# Altium PCB Bluetooth_Module_Programmer.PcbDoc
Units mm, origin at the board's own origin, x right, y up, seen from the top; angles counter-clockwise.
Board outline 36.32 x 17.27 mm, 2 copper layers (Top Layer, Bottom Layer); 5 components, 5 nets, 23 pads, 3 vias.
Unrouted connection lines stored in the file: 1.
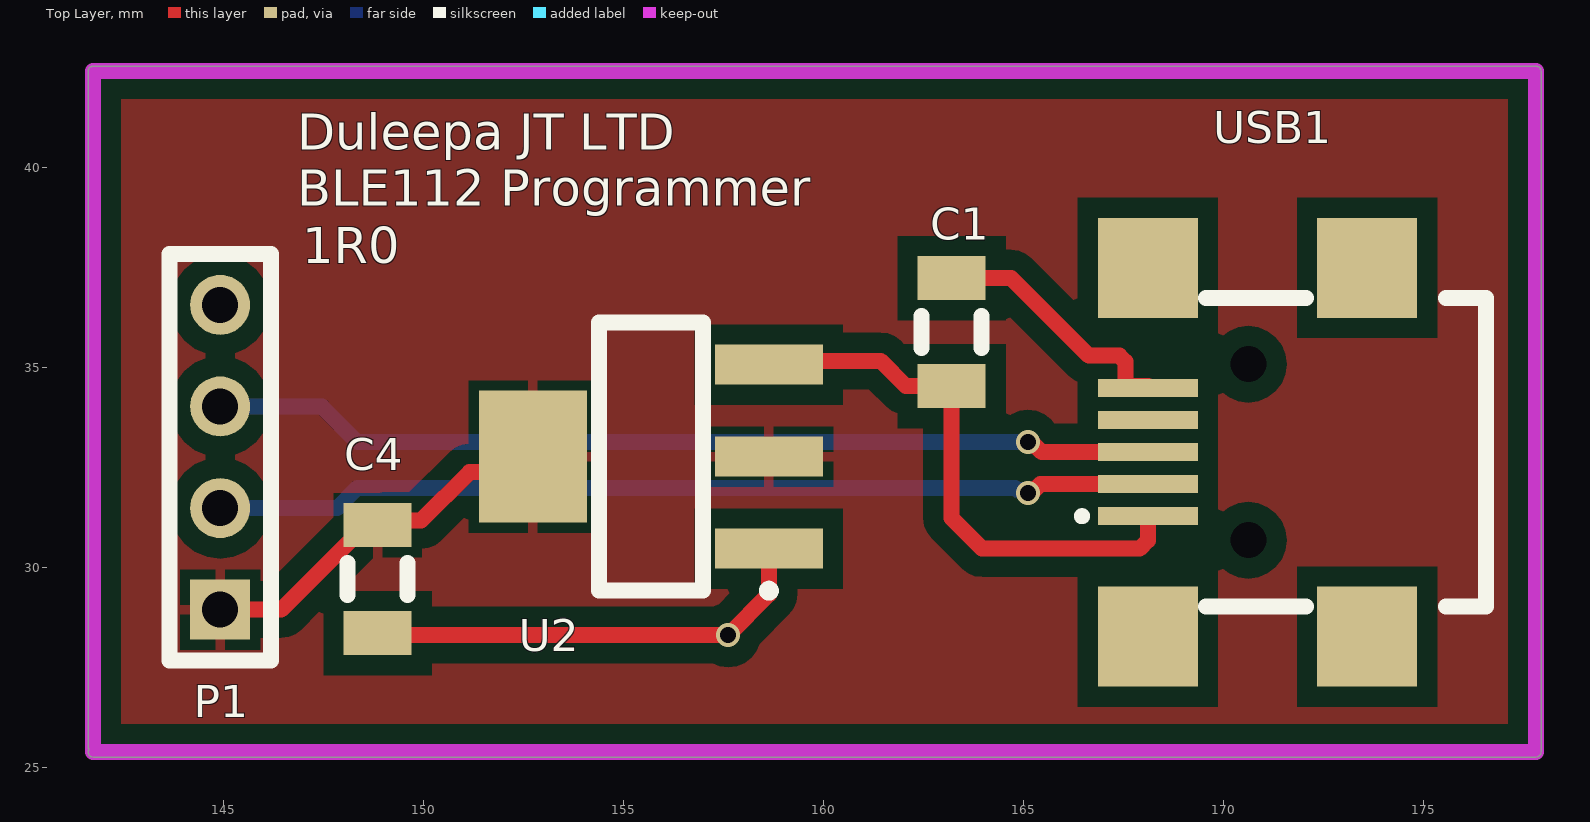
[diagram p0: Top Layer view]
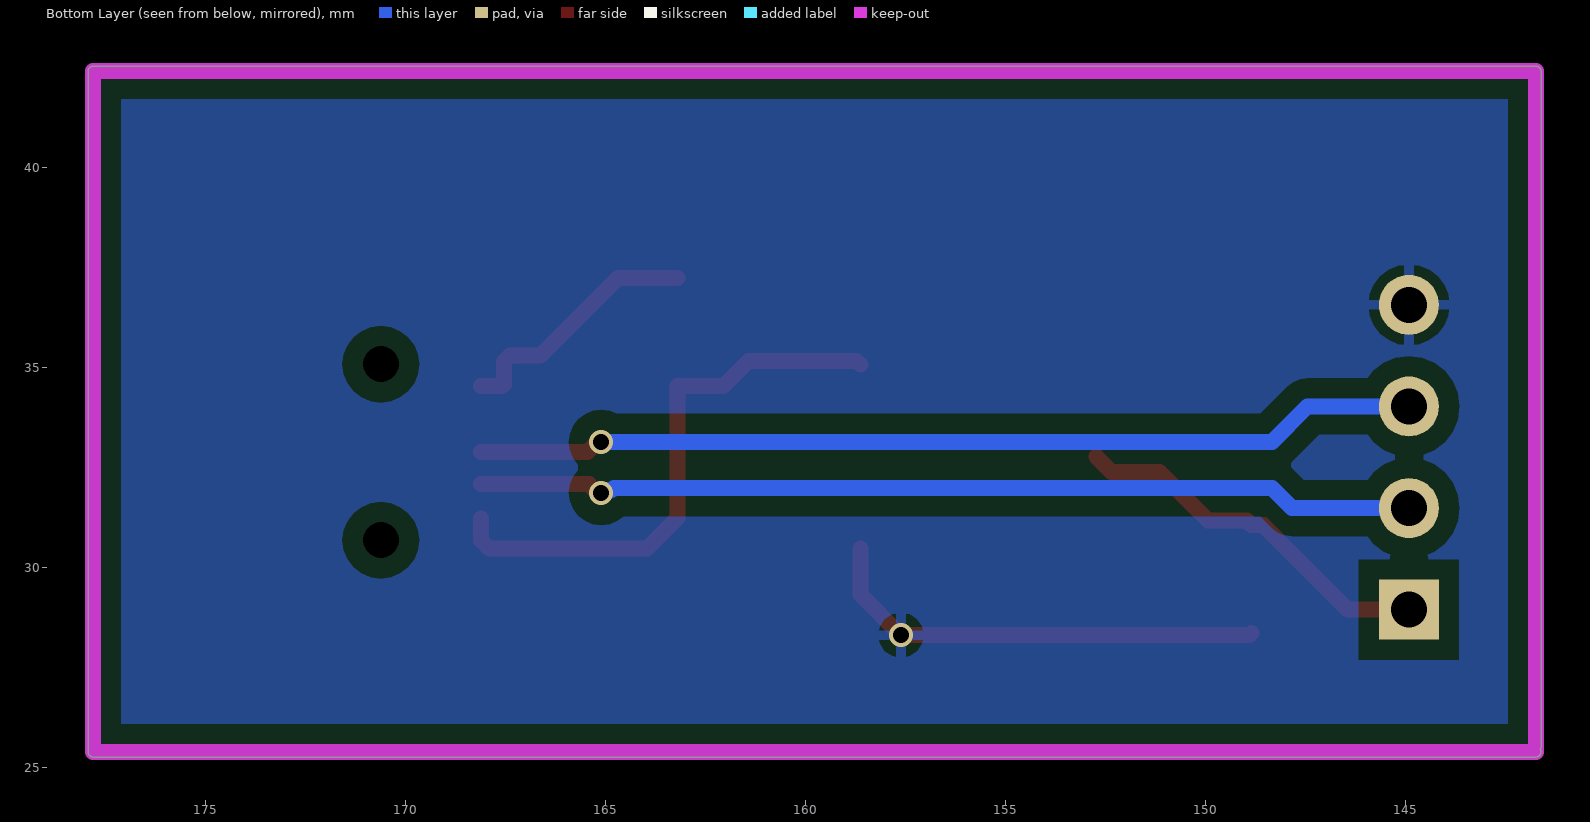
[diagram p1: Bottom Layer view, seen from below]
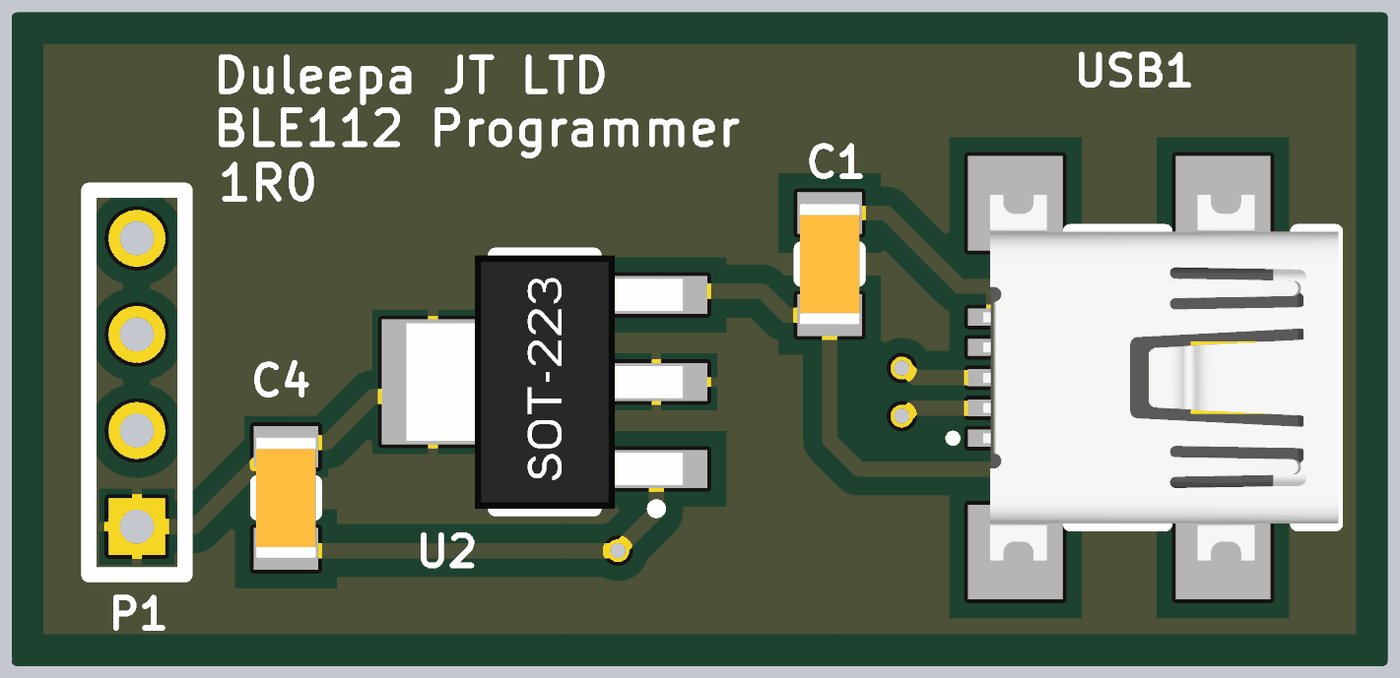
[diagram p2: 3D render of the assembled board from above, using the file's embedded part models]

## Layer stack, top to bottom
Top Solder: solder mask 0.0102, Solder Resist, Dk 3.5
Top Layer: signal copper 0.0356
Dielectric 1: dielectric 0.32, FR-4, Dk 4.8
Bottom Layer: signal copper 0.0356
Bottom Solder: solder mask 0.0102, Solder Resist, Dk 3.5

## Board outline
141.605,25.527 ccw(c141.732,25.527) 141.622,25.463 ccw(c141.732,25.4) 141.732,25.273 177.8,25.273 ccw(c177.8,25.4) 177.927,25.4 177.927,42.418 ccw(c177.8,42.418) 177.8,42.545 141.732,42.545 ccw(c141.732,42.418) 141.605,42.418

## Design rules (kind name [scope] priority, off if disabled: settings)
Clearance [All] p1: gap=0.5 ignorepadtopadclearanceinfootprint=TRUE
PolygonConnect [All] p1: connectstyle=Relief reliefconductorwidth=0.254 reliefentries=4 polygonreliefangle="90 Angle" airgapwidth=0.254
RoutingVias [All] p1: holewidth=0.711 width=1.27 viastyle="Through Hole" minholewidth=0.711 minwidth=1.27 maxholewidth=0.711 maxwidth=1.27
SolderMaskExpansion [All] p1: expansion=0.102 istentingtop=FALSE
Width [All] p1: maxlimit=0.6 minlimit=0.4 preferedwidth=0.4
30 further rules are at their usual default settings.

## Components (designator, comment, footprint, x,y, rotation, side; value= is the part's Value field where it differs from the comment)
C1 "1u" C1206 163.195,35.894 r270 top value=100nF/100V
C4 "4u7" C1206 148.844,29.718 r90 top value=100nF/100V
P1 "Header 4" HDR1X4 144.907,28.956 r90 top
U2 "LDL1117S33R" SOT223L 155.673,32.78 r180 top value=3.3V/1.2A
USB1 "USB Mini B Con" USB_UJ2MAB 171.45,32.893 r90 top

## Footprints (in the part's own frame and the unit in brackets; to place one, negate y for a bottom-side part, rotate by r counter-clockwise, add the part's x,y. Pads: shape width x height; smd on the part's side, far side on the other; paste and mask are expansions set on the pad)
C1206 [mm] "Chip Capacitor, Body 3.2x1.6mm, IPC High Density"
  rect 1.1x1.7 smd: 1(-1.35,0) 2(1.35,0)
  silkscreen extent -0.4,-0.75 0.4,0.75, body extent -1.6,-0.8 1.6,0.8, height 1.5
HDR1X4 [mm] "Connector; Header; 4 Position"
  rect 1.5x1.5 hole 0.9: 1(0,0)
  round 1.5 hole 0.9: 2(2.54,0) 3(5.08,0) 4(7.62,0)
  silkscreen extent -1.27,-1.27 8.89,1.27
SOT223L [mm] "SOT223/SC73, 4-Leads, Body 6.5x3.5mm, Pitch 2.3mm, Lead Span 7mm, IPC Low Density"
  rect 2.7x1 smd: 1(-2.95,2.3) 2(-2.95,0) 3(-2.95,-2.3)
  rect 2.7x3.3 smd: 2(2.95,0)
  silkscreen extent -3.08,-3.35 1.3,3.47, body extent -3.65,-3.35 3.65,3.35, height 1.83
USB_UJ2MAB [mm]
  rect 0.45x2.5 smd: 1(-1.6,3.35) 2(-0.8,3.35) 3(0,3.35) 4(0.8,3.35) 5(1.6,3.35)
  rect 2.5x2.5 smd: 6(-4.61,3.35) 7(4.61,3.35) 8(-4.61,-2.13) 9(4.61,-2.13)
  round 0.45 hole 0.9 unplated: 10(-2.2,0.84) 11(2.2,0.84)
  silkscreen extent -3.86,-5.1 3.86,5.1, body extent -4.83,-5.18 4.83,4.2, height 4.13

## Part data
C1 C4: library part "Cap CER Decoup C3216C0G2A104J160AC", "CAP CER 0.1UF 100V C0G 1206", Manufacturer="TDK Corporation", MPN=C3216C0G2A104J160AC, Supplier Part Number 1=1795799, Part Description="CAP CER 0.1UF 100V C0G 1206", Supplier 1=RSComponents, Supplier 2=Element14, Supplier 3=Digi-Key, Supplier 4=Mouser, Supplier Part Number 2=2906828, Supplier Part Number 3=445-172677-1-ND, Supplier Part Number 4=810-C3216C0G2A104J6C, Type="Surface mount"
P1: "Header, 4-Pin", LatestRevisionDate=17-Jul-2002, LatestRevisionNote="Re-released for DXP Platform.", Publisher="Altium Limited"
U2: library part "LDO LDL1117S33R", "IC REG LINEAR 3.3V 1.2A SOT223", Manufacturer=STMicroelectronics, Supplier Part Number 1=2729708, MPN=LDL1117S33R, Part Description="IC REG LINEAR 3.3V 1.2A SOT223", Supplier 1=Element14, Supplier 2=Digi-Key, Supplier 3=Mouser, Supplier Part Number 2=497-17239-1-ND, Supplier Part Number 3=511-LDL1117S33R, Type="Surface mount"
USB1: library part USBMiniB, Supplier Part Number 1=102-4004-1-ND, Supplier 1=Digi-Key

## Via types
v1: diameter 0.6, hole 0.4, Top Layer to Bottom Layer, 3 vias

## Nets (pads, with @x,y where several pads share a name; then routed paths per layer and width w, separated by ;. In a path a pad name is that pad's centre, name@x,y a point inside that pad or via, vN(x,y) a via of type N, cw(c..) or ccw(c..) an arc to the next point about the centre after c; other vN are vias at no path point)
3V3: C4.2 P1.1 U2.2 | length 9.4
  Top Layer w0.4: P1.1 146.432,28.956 148.544,31.068 C4.2 148.957,31.181 149.926,31.181 151.141,32.396 152.339,32.396 U2.2@152.723,32.78
5V: C1.2 U2.3 USB1.1 | length 14
  Top Layer w0.4: U2.3 158.722,35.179 161.417,35.179 162.052,34.544 C1.2 163.195,31.242 163.957,30.48 167.894,30.48 168.1,30.686 USB1.1@168.1,31.241
D+: P1.3 USB1.3 | length 23.7
  Top Layer w0.4: v1(165.1,33.147) 165.194,33.147 165.448,32.893 USB1.3
  Bottom Layer w0.4: P1.3 147.447,34.036 148.336,33.147 v1(165.1,33.147)
D-: P1.2 USB1.2 | length 23.5
  Top Layer w0.4: v1(165.1,31.877) 165.194,31.877 165.41,32.093 USB1.2
  Bottom Layer w0.4: P1.2 147.828,31.496 148.336,32.004 164.778,32.004 164.839,31.943 165.034,31.943 v1(165.1,31.877)
GND: C1.1 C4.1 P1.4 U2.1 USB1.5 | length 17.7
  Top Layer w0.4: C4.1 148.891,28.321 v1(157.607,28.321) 158.623,29.337 U2.1 ; C1.1 164.683,37.244 166.621,35.306 167.386,35.306 167.535,35.157 167.535,34.591 167.581,34.545 USB1.5@168.1,34.545
pads on no net: USB1.4 USB1.6 USB1.7 USB1.8 USB1.9 USB1.10 USB1.11

## Polygon pours and split planes (outlines as drawn)
GND on Bottom Layer "GND_L02_P000" (solid, pour order 0): 141.732,42.418 177.8,42.418 177.8,25.4 177.737,25.463 141.732,25.463
3V3 on Top Layer "3V3_L01_P001" (solid, pour order 1): 141.732,42.418 177.8,42.418 177.8,25.4 141.732,25.4

## Keep-outs
Keep-Out Layer:
  lines w0.4: 141.732,25.4 141.732,25.527 141.732,41.148 141.732,42.418 177.8,42.418 177.8,25.4 141.732,25.4

## Silkscreen, mask and mechanical layers (free items; w line width, h text height)
Top Overlay:
  text "Duleepa JT LTD" at 146.835,40.455 h0.9
  text "BLE112 Programmer" at 146.835,39.058 h0.9
  text "1R0" at 146.962,37.615 h0.9